# Altium PCB PCB1.PcbDoc
Units mil, origin at the board's own origin, x right, y up, seen from the top; angles counter-clockwise.
Board outline 3937.01 x 787.4 mil, 2 copper layers (Top Layer, Bottom Layer); 4 components, 4 nets, 20 pads, 0 vias.
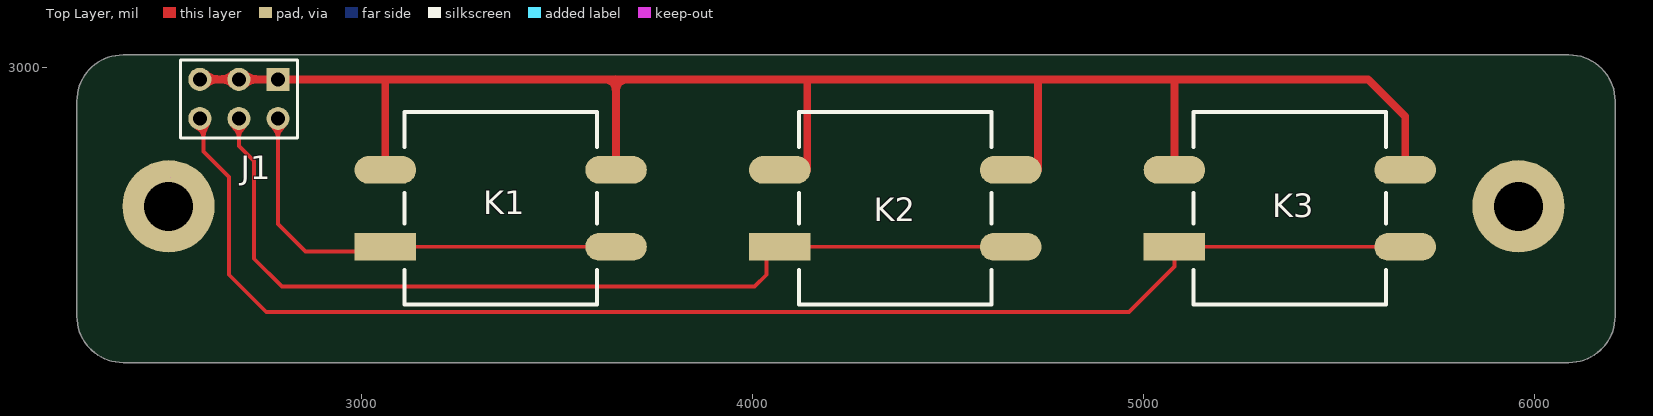
[diagram p0: Top Layer view]
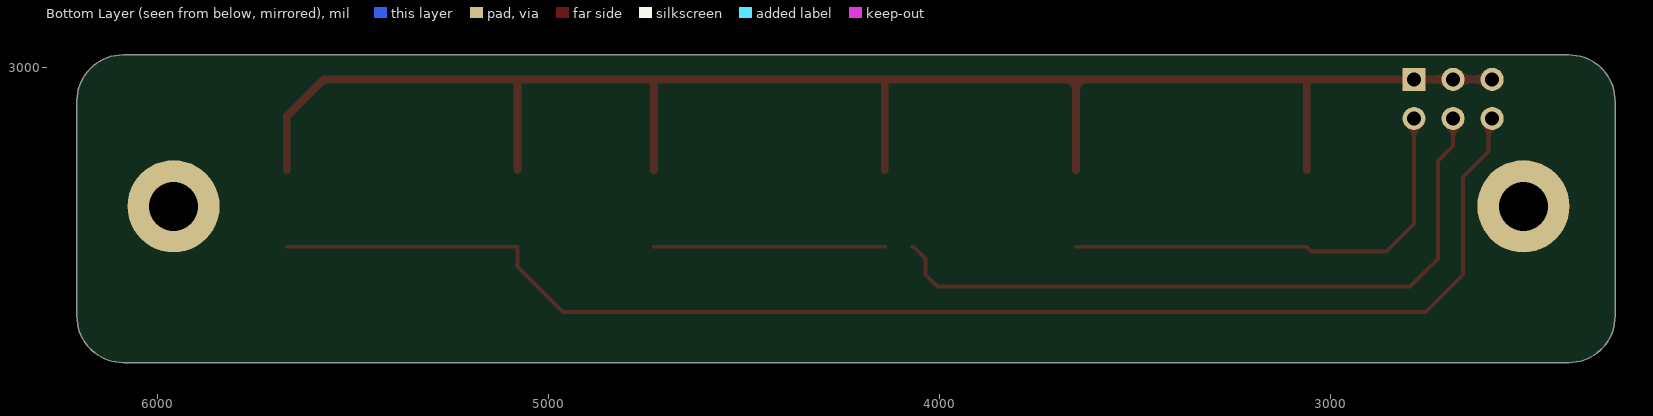
[diagram p1: Bottom Layer view, seen from below]

## Layer stack, top to bottom
Top Solder: solder mask 0.4, Solder Resist, Dk 3.5
Top Layer: signal copper 1.4
Dielectric 1: dielectric 12.6, FR-4, Dk 4.8
Bottom Layer: signal copper 1.4
Bottom Solder: solder mask 0.4, Solder Resist, Dk 3.5

## Board outline
2270.32,2363.43 ccw(c2388.43,2363.43) 2388.43,2245.32 6089.21,2245.32 ccw(c6089.21,2363.43) 6207.32,2363.43 6207.32,2914.61 ccw(c6089.21,2914.61) 6089.21,3032.72 2388.43,3032.72 ccw(c2388.43,2914.61) 2270.32,2914.61
cut-out: 2510,2720
cut-out: 2460,2745

## Design rules (kind name [scope] priority, off if disabled: settings)
Clearance [All] p1: gap=10 ignorepadtopadclearanceinfootprint=FALSE except(0: Arc-Hole Track-Hole SMDPad-Hole THPad-Hole Via-Hole Fill-Hole Poly-Hole Region-Hole Text-Hole)
PolygonConnect [All] p1: connectstyle=Relief reliefconductorwidth=10 reliefentries=4 polygonreliefangle="90 Angle" airgapwidth=10
RoutingVias [All] p1: holewidth=28 width=50 viastyle="Through Hole" minholewidth=28 minwidth=50 maxholewidth=28 maxwidth=50
SolderMaskExpansion [All] p1: expansion=4 istentingtop=FALSE
Width [All] p1: maxlimit=50 minlimit=10 preferedwidth=10 minimp=50.000000 maximp=50.000000 favimp=50.000000
30 further rules are at their usual default settings.

## Components (designator, comment, footprint, x,y, rotation, side; value= is the part's Value field where it differs from the comment)
J1 "Pin HDR2X3" "Pin HDR2X3/2.54mm-S" 2785,2970 r180 top locked
K1 "KEY" SMD-12X12X5 3060,2545 r90 top locked
K2 "KEY" SMD-12X12X5 4069.86,2545 r90 top locked
K3 "KEY" SMD-12X12X5 5079.72,2545 r90 top locked

## Footprints (in the part's own frame and the unit in brackets; to place one, negate y for a bottom-side part, rotate by r counter-clockwise, add the part's x,y. Pads: shape width x height; smd on the part's side, far side on the other; paste and mask are expansions set on the pad)
"Pin HDR2X3/2.54mm-S" [mm] "Connector; Header; 3x2 Position"
  rect 1.5x1.5 hole 0.9: 1(0,0)
  round 1.5 hole 0.9: 2(0,2.54) 3(2.54,0) 4(2.54,2.54) 5(5.08,0) 6(5.08,2.54)
  silkscreen extent -1.27,-1.27 6.35,3.81, body extent -1.27,-1.27 6.35,3.81, height 7.58
SMD-12X12X5 [mm]
  rect 1.8x4 smd: 1(-0.087,0.007)
  oval 1.8x4 smd: 2(4.913,0.007) 3(-0.087,-14.993) 4(4.913,-14.993)
  silkscreen extent -3.84,-13.74 8.66,-1.24, body extent -3.68,-14.97 8.32,0.23, height 5.15

## Free pads (board coordinates)
  round 236.22 hole 125.98: 15(2505,2645) 15(5960,2645)

## Nets (pads, with @x,y where several pads share a name; then routed paths per layer and width w, separated by ;. In a path a pad name is that pad's centre, name@x,y a point inside that pad or via, vN(x,y) a via of type N, cw(c..) or ccw(c..) an arc to the next point about the centre after c; other vN are vias at no path point)
NetJ1_1: J1.1 J1.3 J1.5 K1.2 K1.4 K2.2 K2.4 K3.2 K3.4 | length 4418.2
  Top Layer w20: J1.5 J1.3 J1.1 3060,2970 ; K1.2 3059.72,2969.72 3060,2970 ; K1.4 3650.28,2865.82 3650,2866.1 3650,2970 ; K2.2@4139.45,2738.43 4139.45,2965.55 4135,2970 ; K2.4@4730,2738.43 4730,2965 ; K3.2 5079.45,2964.45 5085,2970 ; K3.4 5670,2875 5575,2970 5085,2970 ; 3060,2970 3650,2970 ; 3650,2970 4135,2970 ; 4135,2970 5085,2970
NetJ1_2: J1.2 K1.1 K1.3 | length 1169.1
  Top Layer w10: J1.2 2785,2600 2855,2530 3048.15,2530 K1.1 K1.3
NetJ1_4: J1.4 K2.1 K2.3 | length 2406.9
  Top Layer w10: J1.4 2685,2800 2724.14,2760.86 2724.14,2510.86 2795,2440 4005,2440 4035,2470 4035,2511.14 4065.43,2541.57 K2.1 ; K2.1@4139.45,2541.57 K2.3@4730,2541.57
NetJ1_6: J1.6 K3.1 K3.3 | length 3579
  Top Layer w10: J1.6 2594.39,2860.61 2594.39,2785.61 2660,2720 2660,2470 2755,2375 4963.31,2375 5079.45,2491.14 K3.1 K3.3

## Polygon pours and split planes (outlines as drawn)
no net on Top Layer "NONET_L-01_P-001" (solid, pour order 0): 2270,2350

## Silkscreen, mask and mechanical layers (free items; w line width, h text height)
Mechanical 1:
  the board outline again, w10.63
Drill Drawing:
  lines w10: 2282.29,3362.5 2348.96,3362.5 2348.96,3429.17 2282.29,3429.17 2282.29,3362.5 ; 2282.29,3529.17 2298.96,3529.17 2315.62,3512.5 2332.29,3529.17 2348.96,3529.17 2332.29,3545.83 2348.96,3562.5 2332.29,3562.5 2315.62,3579.17 2298.96,3562.5 2282.29,3562.5 2298.96,3545.83 2282.29,3529.17
  lines w15: 2222.5,3317.5 12693.6,3317.5 ; 2222.5,3617.5 12693.6,3617.5 ; 2773.38,3167.5 2773.38,3767.5 ; 3253.26,3167.5 3253.26,3767.5 ; 4402.92,3167.5 4402.92,3767.5 ; 4908.8,3167.5 4908.8,3767.5 ; 5642.6,3167.5 5642.6,3767.5 ; 7142.15,3167.5 7142.15,3767.5 ; 7732,3167.5 7732,3767.5 ; 8477.79,3167.5 8477.79,3767.5 ; 9127.62,3167.5 9127.62,3767.5 ; 9981.39,3167.5 9981.39,3767.5 ; 11314.99,3167.5 11314.99,3767.5 ; 2222.5,3167.5 12693.6,3167.5 12693.6,3767.5 2222.5,3767.5 2222.5,3167.5
  text "Symbol" at 2312.5,3662.5 h72
  text "Count" at 2818.38,3662.5 h72
  text "Hole Size" at 3298.26,3662.5 h72
  text "Plated" at 4447.92,3662.5 h72
  text "Hole Type" at 4953.8,3662.5 h72
  text "Drill Layer Pair" at 5687.6,3662.5 h72
  text "Via/Pad" at 7187.15,3662.5 h72
  text "Pad Shape" at 7777,3662.5 h72
  text "Template" at 8522.79,3662.5 h72
  text "Description" at 9172.62,3662.5 h72
  text "Hole Tolerance (+)" at 10026.39,3662.5 h72
  text "Hole Tolerance (-)" at 11359.99,3662.5 h72
  text "2" at 2818.38,3512.5 h60
  text "125.98mil (3.200mm)" at 3298.26,3512.5 h60
  text "PTH" at 4447.92,3512.5 h60
  text "Round" at 4953.8,3512.5 h60
  text "Top Layer - Bottom Layer" at 5687.6,3512.5 h60
  text "Pad" at 7187.15,3512.5 h60
  text "Rounded" at 7777,3512.5 h60
  text "c600h320" at 8522.79,3512.5 h60
  text "6" at 2818.38,3362.5 h60
  text "35.43mil (0.900mm)" at 3298.26,3362.5 h60
  text "PTH" at 4447.92,3362.5 h60
  text "Round" at 4953.8,3362.5 h60
  text "Top Layer - Bottom Layer" at 5687.6,3362.5 h60
  text "Pad" at 7187.15,3362.5 h60
  text "(Mixed)" at 7777,3362.5 h60
  text "(Mixed)" at 8522.79,3362.5 h60
  text "8 Total" at 2818.38,3212.5 h60